# Altium PCB PCB1.PcbDoc
Units mil, origin at the board's own origin, x right, y up, seen from the top; angles counter-clockwise.
Board outline 6000 x 4000 mil, 2 copper layers (Top Layer, Bottom Layer); 7 components, 5 nets, 15 pads, 0 vias.
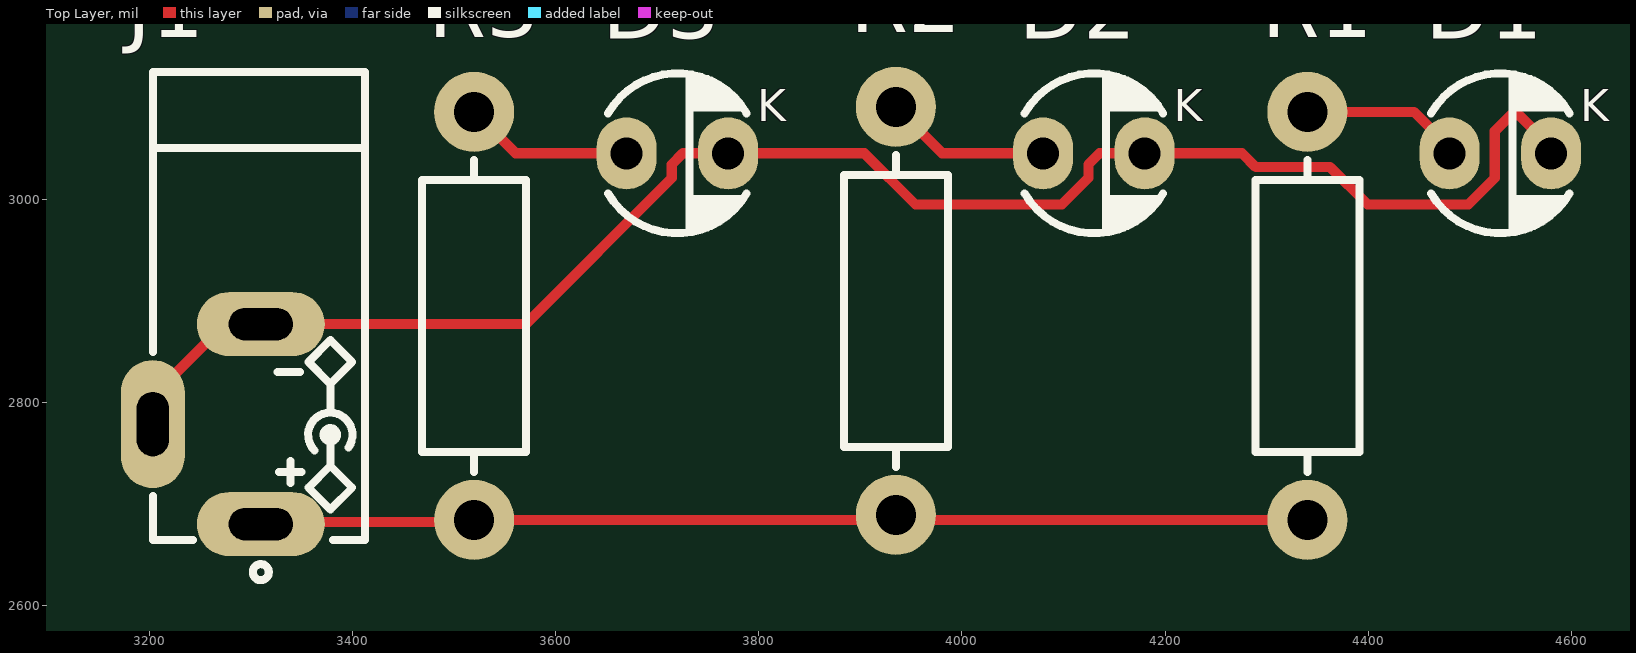
[diagram p0: Top Layer view]
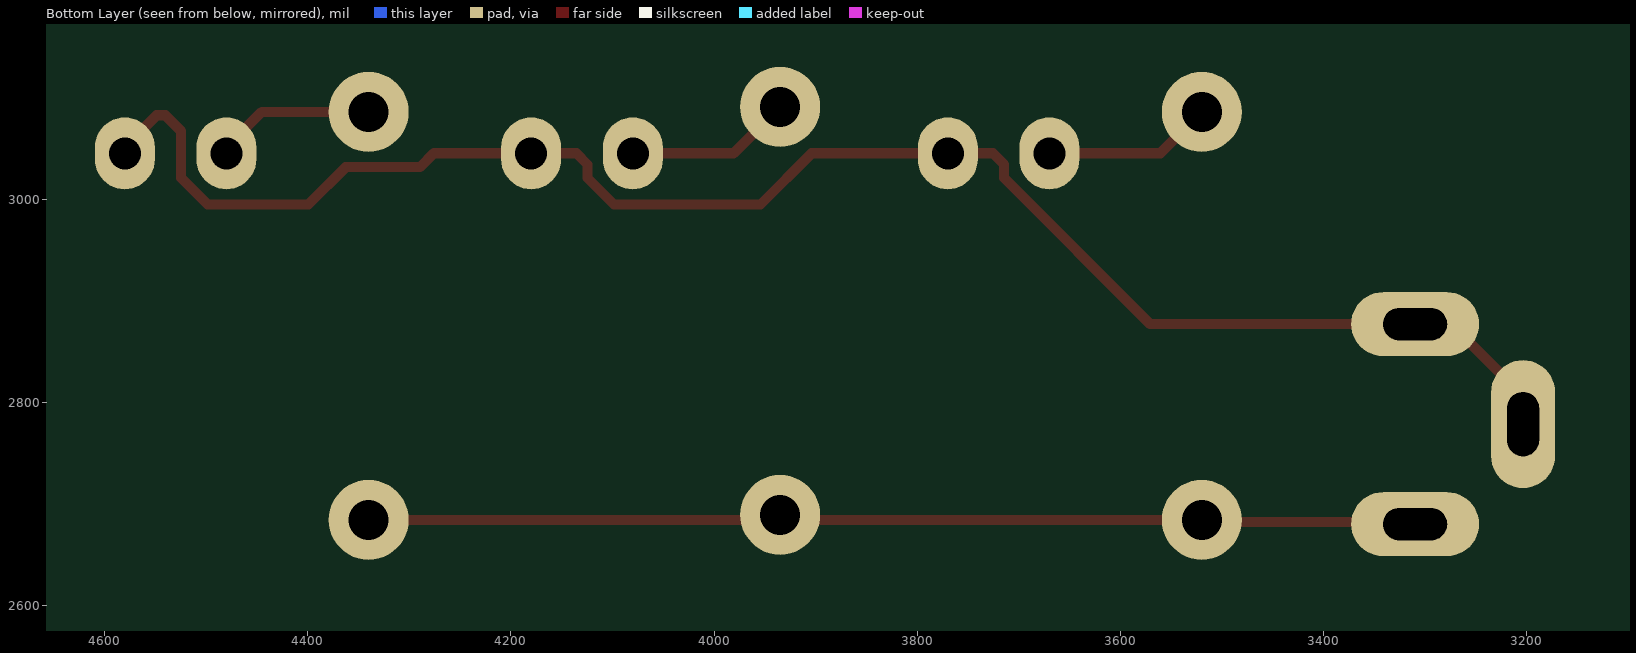
[diagram p1: Bottom Layer view, seen from below]
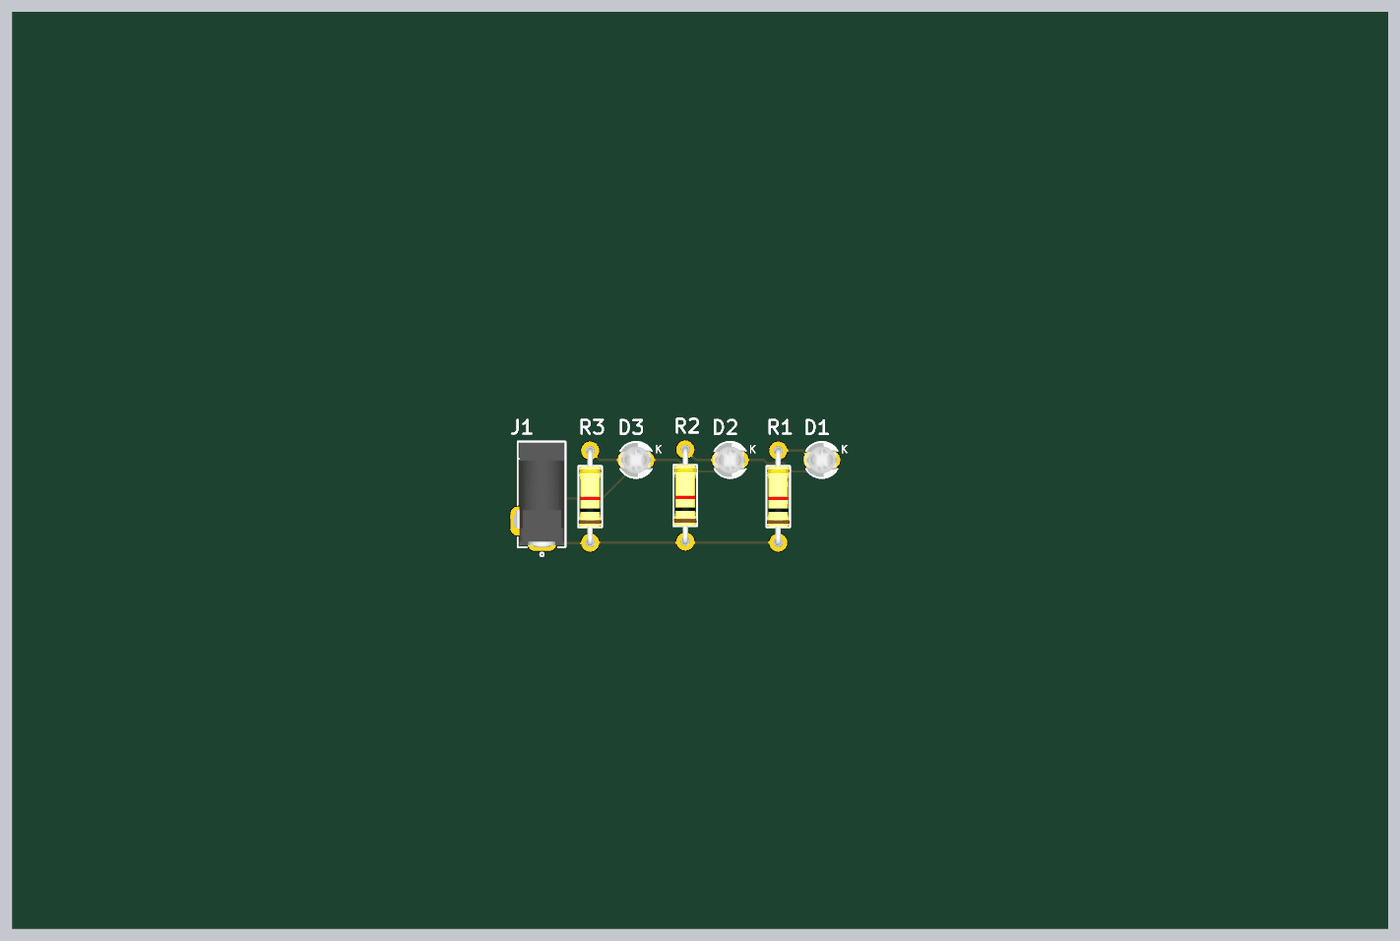
[diagram p2: 3D render of the assembled board from above, using the file's embedded part models]

## Layer stack, top to bottom
Top Solder: solder mask 0.4, Solder Resist, Dk 3.5
Top Layer: signal copper 1.4
Dielectric 1: dielectric 12.6, FR-4, Dk 4.8
Bottom Layer: signal copper 1.4
Bottom Solder: solder mask 0.4, Solder Resist, Dk 3.5

## Board outline
1000,1000 7000,1000 7000,5000 1000,5000

## Design rules (kind name [scope] priority, off if disabled: settings)
Clearance [All] p1: gap=10 ignorepadtopadclearanceinfootprint=FALSE
PolygonConnect [All] p1: connectstyle=Relief reliefconductorwidth=10 reliefentries=4 polygonreliefangle="90 Angle" airgapwidth=10
RoutingVias [All] p1: holewidth=28 width=50 viastyle="Through Hole" minholewidth=28 minwidth=50 maxholewidth=28 maxwidth=50
SolderMaskExpansion [All] p1: expansion=4 istentingtop=FALSE
SupplyNets "Schematic Supply Nets_1" [InNet('GND')] p1: voltage=0.000
SupplyNets "Schematic Supply Nets" [InNet('VCC')] p2: voltage=0.000
Width [All] p1: maxlimit=10 minlimit=10 preferedwidth=10
30 further rules are at their usual default settings.

## Components (designator, comment, footprint, x,y, rotation, side; value= is the part's Value field where it differs from the comment)
D1 "LED3MM" LED3MM 4530,3045 r0 top
D2 "LED3MM" LED3MM 4130,3045 r0 top
D3 "LED3MM" LED3MM 3720,3045 r0 top
J1 "DC_POWER_JACK" JAC_PWR1 3310,2680 r0 top
R1 "10K" R025W_AX04 4340,2885 r90 top
R2 "10K" R025W_AX04 3935,2890 r90 top
R3 "10K" R025W_AX04 3520,2885 r90 top

## Footprints (in the part's own frame and the unit in brackets; to place one, negate y for a bottom-side part, rotate by r counter-clockwise, add the part's x,y. Pads: shape width x height; smd on the part's side, far side on the other; paste and mask are expansions set on the pad)
JAC_PWR1 [mm] "DC POWER JACK, 1mm, Power Jack PJ-031C"
  oval 3.2x1.6 hole 0.8 slot 1.6 at 0 deg: 1(0,0) 2(0,5)
  oval 1.6x3.2 hole 0.8 slot 1.6 at 90 deg: 3(-2.7,2.5)
  silkscreen extent -2.7,-1.4 2.6,11.3, body extent -2.9,-0.4 2.5,11.2, height 7.4
LED3MM [mm] "LED THD 3MM"
  oval 1.5x1.8 hole 0.8: 1(-1.27,0) 2(1.27,0)
  silkscreen extent -1.73,-2 1.73,2, body extent -1.9,-1.9 1.6,1.9, height 6.5
R025W_AX04 [mm] "RESISTOR 1/4 WATT, AXIAL0.4"
  round 2 hole 1: 1(-5.1,0) 2(5.1,0)
  silkscreen extent -3.9,-1.3 3.9,1.3, body extent -5.38,-1.28 5.38,1.28, height 2.6

## Part data
D1 D2 D3: library part LED_THD_3MM, "LED, THD, 3MM, GREEN", ASSEMBLY=ASSEMBLY, DESC=DESCRIPTION, MANF=MANF, MANF_P#=MANF_PART#, PARAM2=2.2V, PRICE=PRICE
J1: library part CONN_PWR_JACKR1, "CONN, PWR JACK DC, PLUG DIAM 1.0MM RA THD", MANF="CUI STACK", MANF_P#="PJ-031CH, PJ-031C", PARAM="CH 3A, C 2A"
R1 R2 R3: library part RES_THD, "RESISTOR, THD", ASSEMBLY=ASSEMBLY, DESC=DESCRIPTION, DIST#=MOUSER, MANF="KOA SPEER", MANF_P#=RK73H1ETTP4701F, PARAM=0.063W, PARAM2=1%, PRICE="100= 0.5$"

## Nets (pads, with @x,y where several pads share a name; then routed paths per layer and width w, separated by ;. In a path a pad name is that pad's centre, name@x,y a point inside that pad or via, vN(x,y) a via of type N, cw(c..) or ccw(c..) an arc to the next point about the centre after c; other vN are vias at no path point)
GND: D1.2 D2.2 D3.2 J1.2 J1.3 | length 1663.5
  Top Layer w10: J1.3 3203.7,2805.98 3274.57,2876.85 J1.2 3570.73,2876.85 3714.53,3020.65 3714.53,3034.06 3725.47,3045 D3.2 3903.9,3045 3954.33,2994.57 4098.44,2994.57 4124.53,3020.65 4124.53,3034.06 4135.47,3045 D2.2 4275.8,3045 4289.38,3031.42 4362.52,3031.42 4399.37,2994.57 4498.44,2994.57 4524.53,3020.65 4524.53,3066.69 4540.23,3082.39 4548.51,3082.39 4580,3050.91 D1.2
NetD1_1: D1.1 R1.2 | length 160.4
  Top Layer w10: R1.2 4445.12,3085.79 4480,3050.91 D1.1
NetD2_1: D2.1 R2.2 | length 164
  Top Layer w10: R2.2 3980.79,3045 D2.1
NetD3_1: D3.1 R3.2 | length 166.9
  Top Layer w10: R3.2 3560.79,3045 D3.1
VCC: J1.1 R1.1 R2.1 R3.1 | length 1048.8
  Top Layer w10: J1.1@3295,2675 3300,2680 J1.1 3312.11,2682.11 3517.89,2682.11 R3.1 R1.1

## Text inside footprints (layer, text, board x,y; h text height)
D1: Top Overlay "K" at 4608.74,3076.5 h31.5
D2: Top Overlay "K" at 4208.74,3076.5 h31.5
D3: Top Overlay "K" at 3798.74,3076.5 h31.5